# Altium PCB 避障车控制板.PcbDoc
Units mil, origin at the board's own origin, x right, y up, seen from the top; angles counter-clockwise.
Board outline 3937.01 x 3937.01 mil, 2 copper layers (Top Layer, Bottom Layer); 128 components, 92 nets, 445 pads, 218 vias.
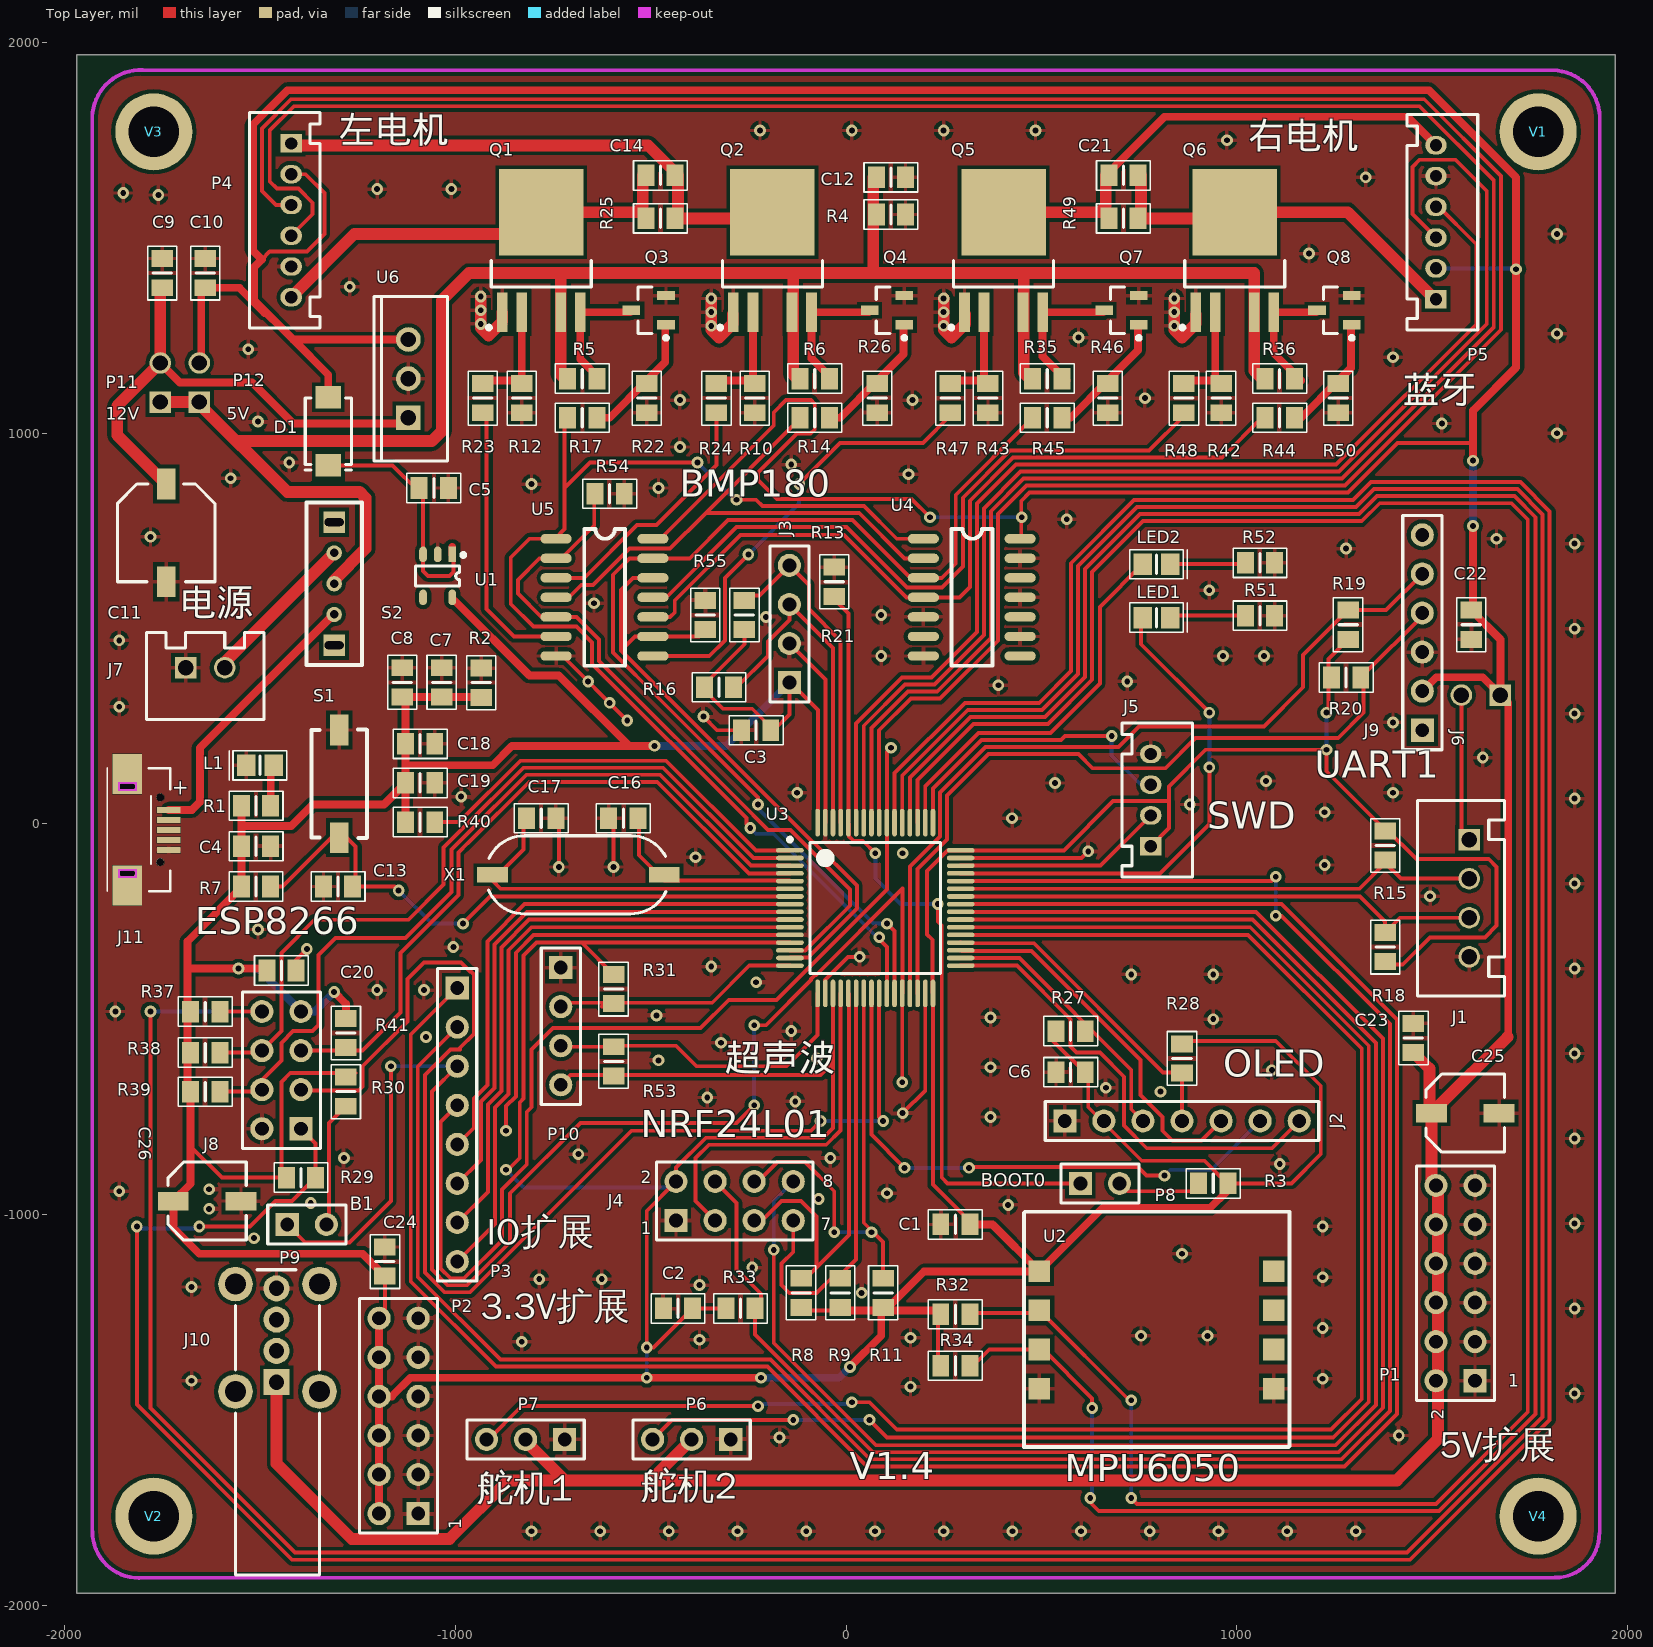
[diagram p0: Top Layer view]
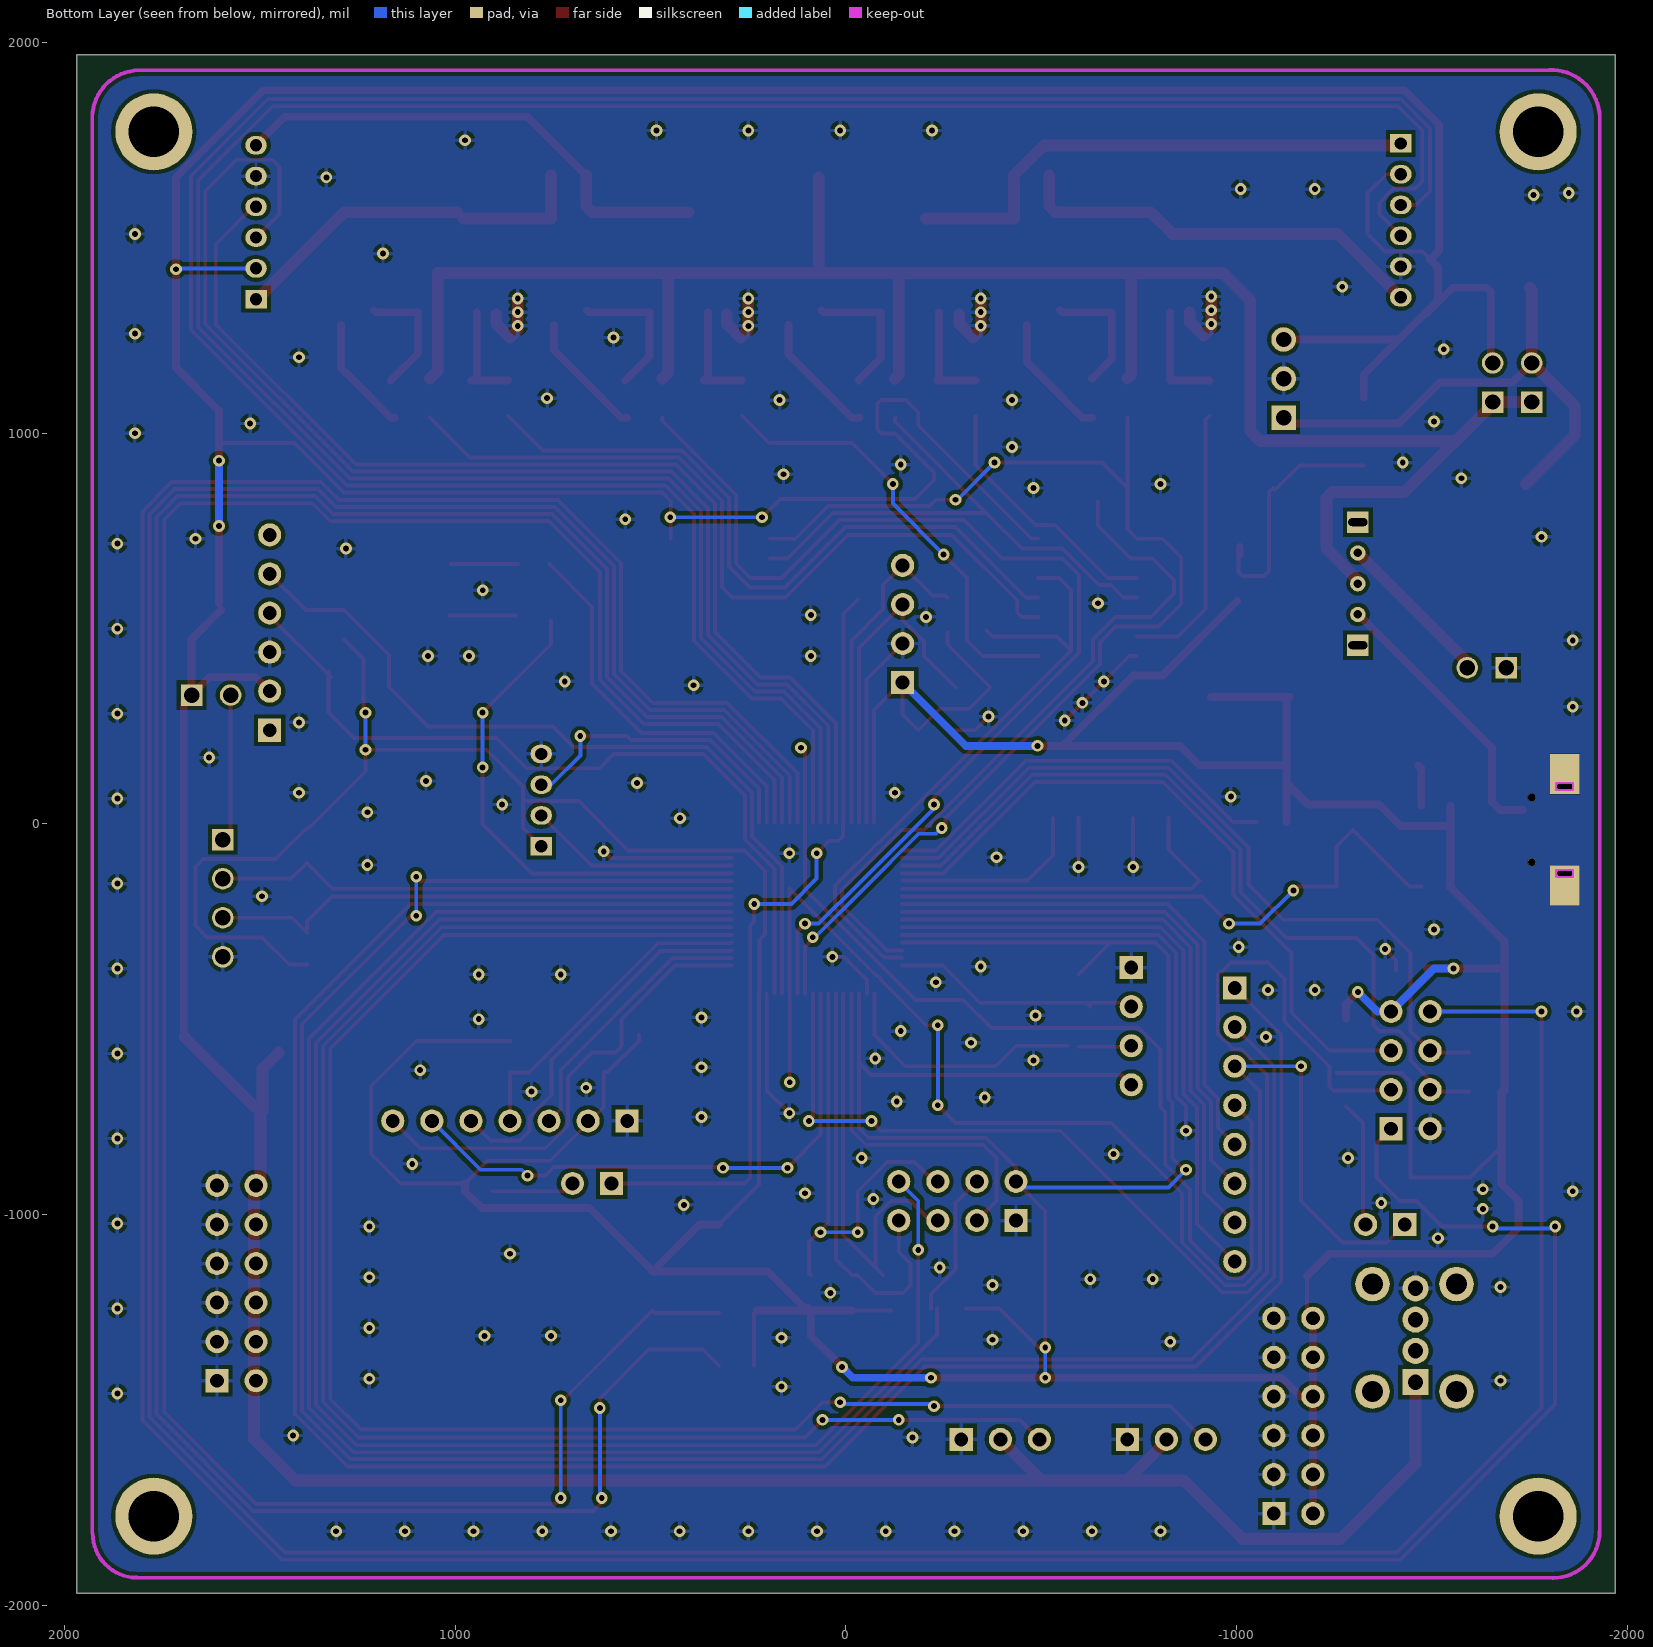
[diagram p1: Bottom Layer view, seen from below]

## Layer stack, top to bottom
Top Layer: signal copper 1.4
Dielectric: dielectric 12.6, FR-4, Dk 4.8
Bottom Layer: signal copper 1.4

## Board outline
-1968.5,-1968.5 1968.5,-1968.5 1968.5,1968.5 -1968.5,1968.5

## Design rules (kind name [scope] priority, off if disabled: settings)
Clearance J11 [InComponent('J11')] p1: gap=0.39
Clearance juli [InPolygon] p2: gap=10
Clearance mcu [InComponent('U3')] p3: gap=6
Clearance [All] p4: gap=8
ComponentClearance [All] p1: gap=2 collisioncheckmode=3 verticalgap=2 showdistances=FALSE
HoleSize [All] p1: absolutevalues=TRUE maxlimit=129.92 minlimit=1 maxpercent=80.000 minpercent=20.000
MinimumSolderMaskSliver MinimumSolderMaskSliver_3 [InComponent('J10')] p1: minsoldermaskwidth=1
MinimumSolderMaskSliver MinimumSolderMaskSliver_2 [InComponent('J11')] p2: minsoldermaskwidth=1
MinimumSolderMaskSliver MinimumSolderMaskSliver_1 [InComponent('U1')] p3: minsoldermaskwidth=5
MinimumSolderMaskSliver [All] p4: minsoldermaskwidth=10
PolygonConnect [All] p1: connectstyle=Relief reliefconductorwidth=10 reliefentries=4 polygonreliefangle="90 Angle"
RoutingVias [All] p1: holewidth=15 width=30 viastyle="Through Hole" minholewidth=5 minwidth=10 maxholewidth=40 maxwidth=50
SilkToSilkClearance [All] p1: silktosilkclearance=5
SilkscreenOverComponentPads [All] p1: minsilkscreentomaskgap=5
SolderMaskExpansion [All] p1: expansion=4
Width [All] p1: maxlimit=50 minlimit=10 preferedwidth=10
23 further rules are at their usual default settings.

## Components (designator, comment, footprint, x,y, rotation, side; value= is the part's Value field where it differs from the comment)
C1 "0.1uF" 0805_N_LY 280,-1025 r180 top
C2 "0.1uF" 0805_N_LY -430,-1240 r180 top
C3 "0.1uF" 0805_N_LY -230,240 r0 top
C4 "0.1uF" 0805_N_LY -1509.84,-56.67 r0 top
C5 "1uF" 0805_N_LY -1055,860 r180 top
C6 "0.1uF" 0805_N_LY 575,-635 r180 top
C7 "10uF" 0805_N_LY -1035,362.6 r90 top
C8 "0.1uF" 0805_N_LY -1135.77,362.6 r90 top
C9 "10uF" 0805_N_LY -1750,1410 r90 top
C10 "0.1uF" 0805_N_LY -1640,1410 r90 top
C11 "100uF" TC6.3*7.7 -1740,745 r270 top
C12 "1uF/50V" 0805_N_LY 115,1655 r0 top
C13 "0.1uF" 0805_N_LY -1300,-160 r180 top
C14 "N/A" 0805_N_LY -475,1660 r180 top
C16 "20pF" 0805_N_LY -570,15 r0 top
C17 "20pF" 0805_N_LY -780,15 r180 top
C18 "1uF" 0805_N_LY -1090,205 r180 top
C19 "0.1uF" 0805_N_LY -1090,105 r180 top
C20 "0.1uF" 0805_N_LY -1445,-375 r180 top
C21 "N/A" 0805_N_LY 710,1660 r180 top
C22 "0.1uF" 0805_N_LY 1600,510 r90 top
C23 "0.1uF" 0805_N_LY 1452.44,-547.6 r90 top
C24 "0.1uF" 0805_N_LY -1180,-1120 r90 top
C25 "10uF" TC5*5 1585,-740 r0 top
C26 "10uF" TC5*5 -1635,-965 r0 top
D1 "SS14" SMA -1325,1005 r270 top
J1 "XH2.54-4P" XH2.54-4P 1595,-90 r270 top
J2 "Header 7" HDR1X7 560,-760 r0 top
J3 "PH2.0-4P" HDR1X4 -145,361.87 r90 top
J4 "Header 4X2" HDR2X4 -435,-1015 r0 top
J5 "PH2.0-4P" PH2.0-4P 780,140 r90 top
J6 "XH2.54-2P" CAP2.54-2P 1625,330 r180 top
J7 "Header 2" XH2.54-2P -1640,400 r0 top
J8 "Header 4X2" HDR2X4 -1395,-780 r90 top
J9 "2.54" HDR1X6 1475,240 r90 top
J10 "USB-4" USB-C -1455,-1315 r270 top
J11 "micro USB" MICRO-USB -1820,-15 r270 top
L1 "LED" 0805_N_LED_LY -1500,150 r180 top
LED1 "LED-Y" 0805_N_LED_LY 794.57,528.33 r0 top
LED2 "LED-Y" 0805_N_LED_LY 794.57,665 r0 top
P1 "Header 6X2" HDR2X6 1610,-1425 r90 top
P2 "Header 6X2" HDR2X6 -1095,-1765 r90 top
P3 "extract" HDR1X8 -995,-420 r270 top
P4 "Header 6" PH2.0-6P -1420,1545 r270 top
P5 "Header 6" PH2.0-6P 1510,1540.26 r90 top
P6 "Header 3" HDR1X3 -295,-1575 r180 top
P7 "Header 3" HDR1X3 -720,-1575 r180 top
P8 "Header 2" HDR1X2 600,-920 r0 top
P9 "Header 2" HDR1X2 -1430,-1025 r0 top
P10 "Header 4" HDR1X4 -730,-367.53 r270 top
P11 "Header 2" CAP2.54-2P -1755,1130 r90 top
P12 "Header 2" CAP2.54-2P -1655,1130 r90 top
Q1 "TO-252-4" TO-252-4L -880,1310 r90 top
Q2 "TO-252-4" TO-252-4L -288.33,1310 r90 top
Q3 "SOT-23" SOT-23_N_LY -505,1315 r180 top
Q4 "SOT-23" SOT-23_N_LY 105,1315 r180 top
Q5 "TO-252-4" TO-252-4L 303.33,1310 r90 top
Q6 "TO-252-4" TO-252-4L 895,1310 r90 top
Q7 "SOT-23" SOT-23_N_LY 705,1315 r180 top
Q8 "SOT-23" SOT-23_N_LY 1250,1315 r180 top
R1 "1K" 0805_N_LY -1509.84,46.67 r180 top
R2 "1K" 0805_N_LY -933.66,361.67 r270 top
R3 "100K" 0805_N_LY 940,-920 r0 top
R4 "10K" 0805_N_LY 115,1560 r180 top
R5 "10K" 0805_N_LY -675,1140 r180 top
R6 "10K" 0805_N_LY -80,1140 r180 top
R7 "10K" 0805_N_LY -1510,-160 r0 top
R8 "10K" 0805_N_LY -115,-1200 r90 top
R9 "10K" 0805_N_LY -15,-1200 r90 top
R10 "10K" 0805_N_LY -233.33,1090 r270 top
R11 "10K" 0805_N_LY 95,-1200 r90 top
R12 "10K" 0805_N_LY -830,1090 r270 top
R13 "10K" 0805_N_LY -260,535 r270 top
R14 "1K" 0805_N_LY -80,1040 r0 top
R15 "10K" 0805_N_LY 1380,-315 r90 top
R16 "10K" 0805_N_LY -325,350 r180 top
R17 "1K" 0805_N_LY -675,1040 r180 top
R18 "10K" 0805_N_LY 1380,-55 r270 top
R19 "10K" 0805_N_LY 1285,510 r270 top
R20 "10K" 0805_N_LY 1280,375 r180 top
R21 "10K" 0805_N_LY -30,620 r90 top
R22 "10K" 0805_N_LY -510,1090 r90 top
R23 "10R" 0805_N_LY -930,1090 r270 top
R24 "10R" 0805_N_LY -331.67,1090 r270 top
R25 "N/A" 0805_N_LY -475,1550 r180 top
R26 "10K" 0805_N_LY 80,1090 r270 top
R27 "10K" 0805_N_LY 575,-530 r180 top
R28 "10K" 0805_N_LY 860,-600 r90 top
R29 "10K" 0805_N_LY -1395,-905 r0 top
R30 "100K" 0805_N_LY -1280,-685 r90 top
R31 "10K" 0805_N_LY -595,-422.53 r270 top
R32 "10K" 0805_N_LY 280,-1255 r180 top
R33 "10K" 0805_N_LY -270,-1240 r180 top
R34 "10K" 0805_N_LY 280,-1386.62 r180 top
R35 "10K" 0805_N_LY 515,1140 r180 top
R36 "10K" 0805_N_LY 1110,1140 r180 top
R37 "10K" 0805_N_LY -1640,-480 r180 top
R38 "10K" 0805_N_LY -1640,-585 r180 top
R39 "10K" 0805_N_LY -1640,-685 r180 top
R40 "0R" 0805_N_LY -1090,5 r0 top
R41 "10K" 0805_N_LY -1280,-535 r90 top
R42 "10K" 0805_N_LY 960,1090 r270 top
R43 "10K" 0805_N_LY 363.33,1090 r270 top
R44 "1K" 0805_N_LY 1110,1040 r0 top
R45 "1K" 0805_N_LY 515,1040 r180 top
R46 "10K" 0805_N_LY 670,1090 r90 top
R47 "10R" 0805_N_LY 266.67,1090 r270 top
R48 "10R" 0805_N_LY 865,1090 r270 top
R49 "N/A" 0805_N_LY 710,1550 r180 top
R50 "10K" 0805_N_LY 1260,1090 r270 top
R51 "10K" 0805_N_LY 1059.57,533.33 r0 top
R52 "10K" 0805_N_LY 1059.57,668.33 r0 top
R53 "10K" 0805_N_LY -595,-607.53 r90 top
R54 "10K" 0805_N_LY -605,845 r0 top
R55 "10K" 0805_N_LY -360,535 r90 top
S1 "SW-PB" SW-KEY -1368,-54.68 r90 top
S2 "SS12D07" SS-12D07 -1310,615 r270 top
U1 "XC6503D331" SOT23-5 -1045,635 r270 top
U2 "MPU6050S" MPU6050S 495,-1145 r0 top
U3 "STM32F103RCT6" LQFP64_N 75,-215 r0 top
U4 "74HCT14" SO-14 195,730 r0 top
U5 "74HCT08" SO-14 -745,730 r0 top
U6 "LM7805" TO-220 -1120,1140 r90 top
V1 "VIA" SH3.3#1 1785,1799.02 r0 top
V2 "VIA" SH3.3#2 3120,-715 r0 top
V3 "VIA" SH3.3#3 2290,-890 r0 top
V4 "VIA" SH3.3#4 2125,-1695 r0 top
X1 "8M" HC-49SMD -685,-130 r0 top

## Footprints (in the part's own frame and the unit in brackets; to place one, negate y for a bottom-side part, rotate by r counter-clockwise, add the part's x,y. Pads: shape width x height; smd on the part's side, far side on the other; paste and mask are expansions set on the pad)
0805_N_LED_LY [mm] "Chip R"
  rect 1.2x1.4 smd: 1(-0.9,0) 2(0.9,0)
  silkscreen extent -1.75,-0.95 2,0.95, body extent -1.07,-0.7 1.07,0.7, height 0.7
0805_N_LY [mm] "Chip R"
  rect 1.1x1.4 smd: 1(-0.95,0) 2(0.95,0)
  silkscreen extent -1.75,-0.95 1.75,0.95, body extent -1.07,-0.7 1.07,0.7, height 0.7
CAP2.54-2P [mm]
  rect 1.4x1.4 hole 1: 1(-1.27,0)
  round 1.4 hole 1: 2(1.27,0)
HC-49SMD [mm]
  rect 2x1 smd: 1(-5.588,0) 2(5.588,0)
  silkscreen extent -5.84,-2.54 5.7,2.54
HDR1X2 [mm]
  rect 1.5x1.5 hole 0.9: 1(0,0)
  round 1.5 hole 0.9: 2(2.54,0)
  silkscreen extent -1.27,-1.27 3.81,1.27
HDR1X3 [mm]
  rect 1.5x1.5 hole 0.9: 1(0,0)
  round 1.5 hole 0.9: 2(2.54,0) 3(5.08,0)
  silkscreen extent -1.27,-1.27 6.35,1.27
HDR1X4 [mm]
  rect 1.5x1.5 hole 0.9: 1(0,0)
  round 1.5 hole 0.9: 2(2.54,0) 3(5.08,0) 4(7.62,0)
  silkscreen extent -1.27,-1.27 8.89,1.27
HDR1X6 [mm]
  rect 1.5x1.5 hole 0.9: 1(0,0)
  round 1.5 hole 0.9: 2(2.54,0) 3(5.08,0) 4(7.62,0) 5(10.16,0) 6(12.7,0)
  silkscreen extent -1.27,-1.27 13.97,1.27
HDR1X7 [mm]
  rect 1.5x1.5 hole 0.9: 1(0,0)
  round 1.5 hole 0.9: 2(2.54,0) 3(5.08,0) 4(7.62,0) 5(10.16,0) 6(12.7,0) 7(15.24,0)
  silkscreen extent -1.27,-1.27 16.51,1.27
HDR1X8 [mm]
  rect 1.5x1.5 hole 0.9: 1(0,0)
  round 1.5 hole 0.9: 2(2.54,0) 3(5.08,0) 4(7.62,0) 5(10.16,0) 6(12.7,0) 7(15.24,0) 8(17.78,0)
  silkscreen extent -1.27,-1.27 19.05,1.27
HDR2X4 [mm]
  rect 1.5x1.5 hole 0.9: 1(0,0)
  round 1.5 hole 0.9: 2(0,2.54) 3(2.54,0) 4(2.54,2.54) 5(5.08,0) 6(5.08,2.54) 7(7.62,0) 8(7.62,2.54)
  silkscreen extent -1.27,-1.27 8.89,3.81
HDR2X6 [mm]
  rect 1.5x1.5 hole 0.9: 1(0,0)
  round 1.5 hole 0.9: 2(0,2.54) 3(2.54,0) 4(2.54,2.54) 5(5.08,0) 6(5.08,2.54) 7(7.62,0) 8(7.62,2.54) 9(10.16,0) 10(10.16,2.54) 11(12.7,0) 12(12.7,2.54)
  silkscreen extent -1.27,-1.27 13.97,3.81
LQFP64_N [mm]
  oval 1.8x0.3 smd: 1(-5.55,3.75) 2(-5.55,3.25) 3(-5.55,2.75) 4(-5.55,2.25) 5(-5.55,1.75) 6(-5.55,1.25) 7(-5.55,0.75) 8(-5.55,0.25) 9(-5.55,-0.25) 10(-5.55,-0.75) 11(-5.55,-1.25) 12(-5.55,-1.75) 13(-5.55,-2.25) 14(-5.55,-2.75) 15(-5.55,-3.25) 16(-5.55,-3.75) 33(5.55,-3.75) 34(5.55,-3.25) 35(5.55,-2.75) 36(5.55,-2.25) 37(5.55,-1.75) 38(5.55,-1.25) 39(5.55,-0.75) 40(5.55,-0.25) 41(5.55,0.25) 42(5.55,0.75) 43(5.55,1.25) 44(5.55,1.75) 45(5.55,2.25) 46(5.55,2.75) 47(5.55,3.25) 48(5.55,3.75)
  oval 0.3x1.8 smd: 17(-3.75,-5.55) 18(-3.25,-5.55) 19(-2.75,-5.55) 20(-2.25,-5.55) 21(-1.75,-5.55) 22(-1.25,-5.55) 23(-0.75,-5.55) 24(-0.25,-5.55) 25(0.25,-5.55) 26(0.75,-5.55) 27(1.25,-5.55) 28(1.75,-5.55) 29(2.25,-5.55) 30(2.75,-5.55) 31(3.25,-5.55) 32(3.75,-5.55) 49(3.75,5.55) 50(3.25,5.55) 51(2.75,5.55) 52(2.25,5.55) 53(1.75,5.55) 54(1.25,5.55) 55(0.75,5.55) 56(0.25,5.55) 57(-0.25,5.55) 58(-0.75,5.55) 59(-1.25,5.55) 60(-1.75,5.55) 61(-2.25,5.55) 62(-2.75,5.55) 63(-3.25,5.55) 64(-3.75,5.55)
  silkscreen extent -5.67,-4.25 4.25,4.57
MICRO-USB [mm]
  rect 0.4x1.55 smd: 1(-1.3,2.2) 2(-0.65,2.2) 3(0,2.2) 4(0.65,2.2) 5(1.3,2.2)
  rect 2.6x1.9 hole 0.4 slot 1 at 90 deg copper offset -0.8,0: 6(-2.825,-0.5)
  rect 2.6x1.9 hole 0.4 slot 1 at 90 deg copper offset 0.8,0: 6(2.825,-0.5)
  round 0.5 hole 0.5 unplated: ""(-2.1,1.65) ""(2.1,1.65)
  Keep-Out Layer lines w0.127: 3.054,-1.043 3.054,0.075 2.596,0.075 2.596,-1.043 3.054,-1.043 ; -2.596,-1.043 -2.596,0.075 -3.054,0.075 -3.054,-1.043 -2.596,-1.043
  silkscreen extent -4.05,-1.8 4,2.3
MPU6050S [mm]
  rect 1.4x1.4 smd: 1(0,0) 2(0,-2.54) 3(0,-5.08) 4(0,-7.62) 5(15.24,0) 6(15.24,-2.54) 7(15.24,-5.08) 8(15.24,-7.62)
  silkscreen extent -1,-11.43 16.25,3.88
PH2.0-4P [mm]
  rect 1.2x1.4 hole 0.8: 1(-5,0)
  oval 1.2x1.4 hole 0.8: 2(-3,0) 3(-1,0) 4(1,0)
  silkscreen extent -7.01,-2.72 3,1.88
PH2.0-6P [mm]
  rect 1.2x1.4 hole 0.8: 1(-5,0)
  oval 1.2x1.4 hole 0.8: 2(-3,0) 3(-1,0) 4(1,0) 5(3,0) 6(5,0)
  silkscreen extent -7.01,-2.72 7,1.88
SH3.3#1 [mm]
  round 5 hole 3.3: 1(-0.339,-0.695)
SH3.3#2 [mm]
  round 5 hole 3.3: 1(-124.248,-26.839)
SH3.3#3 [mm]
  round 5 hole 3.3: 1(-103.166,67.606)
SH3.3#4 [mm]
  round 5 hole 3.3: 1(-8.975,-1.947)
SMA [mm]
  rect 1.45x1.65 smd: 1(-2.21,0) 2(2.21,0)
  silkscreen extent -2.16,-1.5 2.51,1.5
SO-14 [mil]
  oval 80x24 smd: 1(2.95,0) 2(2.95,-50) 3(2.95,-100) 4(2.95,-150) 5(2.95,-200) 6(2.95,-250) 7(2.95,-300) 8(250.71,-300) 9(250.71,-250) 10(250.71,-200) 11(250.71,-150) 12(250.71,-100) 13(250.71,-50) 14(250.71,0)
  silkscreen extent 75,-325 180,25
SOT23-5 [mil] "SOT23, 5-Leads, Body 3.1x3."
  rect 40x20 smd: 1(-55,37.4)
  oval 40x20 smd: 2(-55,0) 3(-55,-37.4) 4(55,-37.4) 5(55,37.4)
  silkscreen extent -59,-57 26,70
SOT-23_N_LY [mm] "SOT23, 3-Leads, Body 2.9x1.3mm, Pitch"
  rect 1.15x0.6 smd: 1(-1.125,0.95) 2(-1.125,-0.95) 3(1.125,0)
  silkscreen extent -1.25,-1.5 0.7,1.92, body extent -0.7,-1.5 0.7,1.5, height 1.1
SS-12D07 [mm]
  round 1 hole 0.55: 1(-2,0) 2(0,0) 3(2,0)
  rect 1.4x1.4 hole 0.5 slot 1.25 at 90 deg: ""(-4,0) ""(4,0)
  silkscreen extent -5.28,-1.8 5.28,1.8
SW-KEY [mm]
  rect 2x1.2 smd: 1(0.5,-1.8) 2(7.5,-1.8)
  silkscreen extent 0.48,-3.6 7.52,0
TC5*5 [mm]
  rect 2x1.2 smd: 1(-2.2,0) 2(2.2,0)
  silkscreen extent -2.54,-2.54 2.54,2.54
TC6.3*7.7 [mm]
  rect 2x1.2 smd: 1(-3.175,0) 2(3.175,0)
  silkscreen extent -3.18,-3.18 3.18,3.18
TO-220 [mm]
  rect 1.6x1.6 hole 1: 1(-2.54,0)
  round 1.6 hole 1: 2(0,0) 3(2.54,0)
  silkscreen extent -5.35,-2.55 5.35,2.25
TO-252-4L [mm]
  rect 2.55x0.7 smd: 1(0,0) 2(0,-1.27) 3(0,-3.81) 4(0,-5.08)
  rect 5.6x5.5 smd: 5(6.5,-2.54)
  silkscreen extent -1.12,-5.79 3.35,0.98
USB-C [mm]
  round 2.25 hole 1.35: 0(-3.493,2.73) 0(-3.492,-2.731) 0(3.492,2.731) 0(3.493,-2.73)
  rect 1.7x1.7 hole 1: 1(2.883,-0.063)
  round 1.7 hole 1: 2(0.851,-0.063) 3(-1.181,-0.064) 4(-3.213,-0.064)
  silkscreen extent -4.43,-2.73 15.43,2.73
XH2.54-2P [mm]
  rect 1.4x1.4 hole 1: 1(-1.27,0)
  round 1.4 hole 1: 2(1.27,0)
  silkscreen extent -3.81,-3.35 3.81,2.29
XH2.54-4P [mm]
  rect 1.4x1.4 hole 1: 1(-1.27,0)
  round 1.4 hole 1: 2(1.27,0) 3(3.81,0) 4(6.35,0)
  silkscreen extent -3.81,-3.35 8.89,2.29

## Part data
C1 C2 C4 C5 C6 C7 C8 C9 C10 C12 C13 C14 C16 C17 C18 C19 C20 C21 C22: library part Cap, "Capacitor"
C11: library part Cap100uf
C25 C26: library part Cap10uf
J2 P6 P7 P10: "He"
J3: library part "Header 4", "He"
J4 J8: "Header, 4-Pin"
J5: library part "Header 4", "H"
J7 P4 P5: "H"
J9: library part "Header 6"
P1 P2: "Header, 6-Pin"
P3: library part "Header 8", "He"
Q3 Q4 Q7 Q8: library part NPN, "NPN Bipolar Transistor"
R1 R2 R4 R5 R6 R7 R10 R12 R14 R17 R21 R22 R23 R24 R25 R26 R35 R36 R40 R42 R43 R44 R45 R46 R47 R48 R49 R50: library part Res1, "Resistor"
U1: library part XC6503Dxxx

## Via types
v1: diameter 30, hole 15, Top Layer to Bottom Layer, tented both sides, 218 vias

## Nets (pads, with @x,y where several pads share a name; then routed paths per layer and width w, separated by ;. In a path a pad name is that pad's centre, name@x,y a point inside that pad or via, vN(x,y) a via of type N, cw(c..) or ccw(c..) an arc to the next point about the centre after c; other vN are vias at no path point)
BMP180_SCL: J3.3 R16.1 U3.62 | length 872.4
  Top Layer w10: R16.1@-280,350 -200,430 -200,467.01 -145,522.01 J3.3 -33.27,450.14 U3.62
BMP180_SDA: J3.4 R13.1 U3.61 | length 861.7
  Top Layer w10: R13.1@-260,580 -255,585 -221.87,585 J3.4 -95,611.87 -95,550 -13.58,468.58 U3.61
BOOT0: P8.1 R21.1 U3.60 | length 2042
  Top Layer w10: R21.1@-30,575 6.1,538.9 U3.60 7.79,1.82 7.79,-31.93 18.78,-42.93 42.93,-42.93 v1(75,-75) ; v1@230,-200 v1(235,-205) 235,-249.31 245,-259.31 245,-905 260,-920 P8.1@610,-920
  Bottom Layer w10: v1(75,-75) 75,-140 140,-205 v1(235,-205)
ESP_CH_PD: J8.3 U3.25 | length 3221.5
  Top Layer w10: J8.3 -1392.75,-682.25 -1247.06,-682.25 -1237.13,-672.32 -1237.13,-620.13 -1122,-505 -1122,-397 -1080,-355 -985,-355 -962.53,-377.47 -960.09,-377.47 -952.47,-385.09 -952.47,-537.62 -987.47,-572.62 -987.47,-577.47 -1012.62,-577.47 -1078,-642.86 -1078,-1148.05 -1027.53,-1198.53 -962.47,-1198.53 -548.95,-785 -90,-785 v1(-65,-760) ; U3.25 84.84,-749.84 88.61,-753.61 v1@88.61,-762.84
  Bottom Layer w10: v1(-65,-760) v1(95,-760)
ESP_GP0: J8.6 R38.1 U3.2 | length 2022
  Top Layer w10: R38.1@-1595,-585 -1500,-585 -1445,-530 -1445,-330 -1360,-245 -1120,-245 -1030,-155 -1030,-60 -983,-13 -982.54,-13 -825.54,144 -468.09,144 -237.04,-87.05 U3.2
ESP_GP2: J8.4 R39.1 U3.3 | length 2093.9
  Top Layer w10: R39.1@-1595,-685 -1500,-685 J8.4 -1495,-655 -1445,-605 -1445,-560 -1415,-530 -1365.46,-530 -1350,-514.54 -1350,-335 -1306.79,-291.79 -1127.25,-291.79 -1010,-174.54 -1010,-65.46 -975.54,-31 -975.09,-31 -818.09,126 -475.54,126 -242.81,-106.73 U3.3
ESP_GP16: J8.5 R41.1 U3.4 | length 1786.8
  Top Layer w10: J8.5 -1237.6,-580 -1140,-482.4 -1140,-330 -992,-182 -992,-72.91 -968.09,-49 -967.63,-49 -810.63,108 -483,108 -248.58,-126.42 U3.4
ESP_URXD: J8.8 R37.1 U3.53 | length 9829.9
  Top Layer w10: v1(-1780,-480) -1780,-1495.14 -1410.14,-1865 1435.91,-1865 1783,-1517.91 1783,792.46 1718.46,857 1351.09,857 1305.09,811 745.09,811 594,659.91 594,384 502,292 311.54,292 143.9,124.35 U3.53 ; R37.1 J8.8
  Bottom Layer w10: v1(-1780,-480) J8.8
ESP_UTXD: J8.1 R29.2 U3.54 | length 9664
  Top Layer w10: v1@-1815,-1035 -1815,-1485.6 -1417.6,-1883 1443.37,-1883 1801,-1525.37 1801,799.91 1725.91,875 1343.63,875 1297.63,829 737.63,829 576,667.37 576,391.46 494.54,310 304.09,310 124.21,130.12 U3.54 ; v1(-1655,-1030) -1525,-1030 -1460,-965 -1417.6,-965 R29.2 -1357.6,-817.4 J8.1
  Bottom Layer w10: v1@-1815,-1035 -1655,-1035 v1(-1655,-1030)
  other v1: -1815,-1030
EXTRACT1: P3.1 U3.41 | length 5824.3
  Top Layer w10: P3.1 -1114,-539 -1114,-1171 -896,-1389 -201,-1389 54,-1644 1276,-1644 1410,-1510 1410,-500 1115.16,-205.16 U3.41
EXTRACT2: P3.2 U3.44 | length 5721.8
  Top Layer w10: P3.2 -1096,-621 -1096,-1159 -884,-1371 -193.54,-1371 61.46,-1626 1268.54,-1626 1392,-1502.54 1392,-512 1115,-235 v1(1100,-235) ; U3.44 1088.9,-146.1 v1(1100,-135)
  Bottom Layer w10: v1(1100,-235) v1(1100,-135)
EXTRACT3: P3.3 P9.1 U3.28 | length 3722.8
  Top Layer w10: P9.1 -1384.06,-1070.94 -1270.94,-1070.94 -1165,-965 v1(-1165,-620) ; P3.3 -1060,-685 -1060,-1140.6 -1020.07,-1180.53 -969.93,-1180.53 -860,-1070.6 -860,-945 -680,-765 -280,-765 v1(-235,-720) ; v1(-235,-515) -205,-515 -89.54,-399.54 -89.54,-396.97 -79.64,-387.07 -77.07,-387.07 145,-165 U3.28@145,-432.4 ; v1(143.9,-661.1) U3.28
  Bottom Layer w10: v1(-1165,-620) P3.3 ; v1(-235,-720) v1(-235,-515)
EXTRACT4: P3.4 U3.55 | length 2608.6
  Top Layer w10: P3.4 -1037.53,-762.53 -1037.53,-1137.62 -1012.62,-1162.53 -977.38,-1162.53 -880.47,-1065.62 -880.47,-935.07 -817,-871.6 -817,-737 -805,-725 -805,-577.53 -749.94,-522.47 -372.47,-522.47 -300,-450 -177.43,-450 104.53,-168.04 U3.55 104.53,184.53 v1(115,195)
EXTRACT5: P3.5 U3.8 | length 1365.3
  Top Layer w10: P3.5 -952.47,-777.47 -952.47,-702.93 -918,-668.46 -918,-300.72 -822.44,-205.16 U3.8
EXTRACT6: P3.6 U3.9 | length 1442.2
  Top Layer w10: P3.6 -934.47,-859.47 -934.47,-710.38 -900,-675.91 -900,-308.18 -816.67,-224.84 U3.9
EXTRACT7: P3.7 U3.10 | length 1519.1
  Top Layer w10: P3.7 -916.47,-941.47 -916.47,-717.84 -882,-683.37 -882,-315.63 -810.89,-244.53 U3.10
EXTRACT8: P3.8 U3.11 | length 1596.1
  Top Layer w10: P3.8 -898.47,-1023.47 -898.47,-725.3 -864,-690.82 -864,-323.09 -805.12,-264.21 U3.11
GND: C1.2 C2.2 C3.1 C4.2 C5.1 C6.2 C7.2 C8.2 C9.2 C10.2 C11.2 C12.2 C13.2 C16.1 C17.1 C18.1 C19.1 C20.1 C22.1 C23.2 C24.2 C25.2 C26.2 J1.4 J2.1 J3.2 J4.1 J5.4 J7.1 J8.2 J9.3 J10.4 J11.5 L1.2 P1.1 P1.3 P1.5 P1.7 P1.9 P1.11 P2.1 P2.3 P2.5 P2.7 P2.9 P2.11 P4.5 P5.5 P6.1 P7.1 P10.1 Q1.1 Q2.1 Q3.2 Q4.2 Q5.1 Q6.1 Q7.2 Q8.2 R2.1 R4.1 R10.2 R12.2 R21.2 R22.1 R26.2 R42.2 R43.2 R46.1 R50.2 R51.2 R52.2 R54.2 R55.2 S1.2 U1.2 U2.4 U2.8 U3.12 U3.18 U3.31 U3.47 U3.63 U4.5 U4.7 U4.9 U4.11 U4.13 U5.7 U6.2 | length 3896.9
  Top Layer w10: C20.1 -1407.6,-347.6 v1(-1380,-320) ; v1(-870,-785) -870,-722.28 -845,-697.28 -845,-329.54 -799.35,-283.9 U3.12 ; U5.7 -725,430 v1(-560,265) ; v1(-735,-110) C17.1@-735,15 ; v1(-595,-110) C16.1@-595,15 ; v1(-365,275) -330,240 C3.1@-275,240 ; J3.2 -52.95,369.82 U3.63 ; U3.18@-54.05,-433.5 -54.05,-399.5 5.46,-340 v1(35,-340) ; v1(145,-740) 202.95,-682.05 U3.31 ; U3.47 602.95,-87.05 v1(620,-70)
  Top Layer w30: v1(-935,1350) -935,1270 -915,1250 -880,1285 Q1.1 ; v1(-345,1345) -345,1265 -325,1245 -290,1280 Q2.1@-290,1305 ; v1(250,1345) 250,1265 270,1245 305,1280 Q5.1@305,1305 ; v1(840,1345) 840,1265 860,1245 895,1280 Q6.1@895,1305
  other v1: -805,-1810 -629.17,-1810 -453.33,-1810 -277.5,-1810 -101.67,-1810 74.17,-1810 250,-1810 425.83,-1810 601.67,-1810 777.5,-1810 953.33,-1810 1129.17,-1810 1305,-1810 -170,-1570 1415,-1565 1865,-1457.5 165,-1440 -1675,-1425 1220,-1420 -830,-1325 -375,-1320 165,-1315 755,-1310 925,-1310 1220,-1290 1865,-1240 40,-1200 -1675,-1185 -375,-1180 -785,-1165 -625,-1165 1220,-1160 -240,-1135 860,-1100 -1515,-1060 1220,-1030 1865,-1022.5 -1630,-985 415,-975 -1370,-970 -70,-960 105,-945 -1860,-940 -1630,-935 1110,-870 -1285,-855 -40,-855 -685,-845 1865,-805 370,-750 -130,-710 -355,-700 805,-685 665,-675 1090,-630 370,-622.5 -480,-605 -75,-600 1865,-587.5 -320,-560 -1075,-545 -140,-530 940,-499.5 370,-495 -485,-490 -1870,-480 -1200,-425 -1080,-425 -230,-405 730,-385 940,-385 1865,-370 -345,-365 -1005,-315 -1505,-270 1495,-185 1865,-152.5 1225,-105 -385,-85 145,-75 425,15 1225,30 880,50 1865,65 -985,70 -125,80 1400,80 535,105 1075,110 1630,170 1400,260 1865,282.5 -1860,300 -605,310 390,355 -660,365 720,365 90,430 965,430 1070,430 -1860,470 1865,500 -205,530 90,535 -645,565 929.57,598.33 1280,705 1865,717.5 1665,730 -1780,735 565,780 -480,860 -805,870 -1575,885 160,895 -140,920 -1425,925 -425,965 1820,1000 1525,1025 -1505,1030 -425,1085 170,1085 765,1090 1400,1194.5 -1530,1215 595,1245 1820,1255 -345,1275 250,1275 840,1275 -935,1280 -345,1310 250,1310 840,1310 -935,1315 -1270,1375 1185,1460 1820,1510 -1760,1610 -1850,1615 -1200,1625 -1010,1625 1330,1655 975,1750 -220,1775 15,1775 250,1775 485,1775
HC-EN: J9.1
HC-RX: J9.5 R19.1 U3.29 | length 2060.4
  Top Layer w10: U3.29 163.58,-108.99 240.64,-31.93 240.64,80.64 357,197 697,197 750,250 1070,250 1170,350 1170,432.4 R19.1 1382.4,547.4 J9.5
HC-STATUS: J9.6
HC-TX: J9.4 R20.1 U3.30 | length 2057.3
  Top Layer w10: U3.30 183.27,-114.76 258.64,-39.39 258.64,73.18 364.46,179 595,179 631.25,142.75 817.75,142.75 895,220 1260,220 1325,285 R20.1@1325,382.6 ; R20.1 R20.1@1325,382.6 ; R20.1@1325,390 R20.1@1325,382.6 ; J9.4 1475,532.6 R20.1@1325,382.6
LED1: LED1.1 U3.45 | length 1281.6
  Top Layer w10: U3.45 804.04,-126.42 930,-0.46 v1(930,145) ; LED1.1@755,520 755,460 v1(930,285)
  Bottom Layer w10: v1(930,145) v1(930,285)
LED2: LED2.1 U3.50 | length 999.7
  Top Layer w10: U3.50 202.95,97.04 338.91,233 523,233 650,360 650,555.87 LED2.1
M1-A: C14.2 P4.6 Q1.5 R25.2 | length 1075
  Top Layer w30: P4.6 -1258.15,1510 -835.91,1510 Q1.5 -535.91,1565.91 -520,1581.81 C14.2@-520,1660
M1-B: C14.1 P4.1 Q2.5 R25.1 | length 1357.6
  Top Layer w30: P4.1@-1420,1736.85 -506.85,1736.85 -430,1660 -430,1550 Q2.5@-204.24,1550
M1-DIR: R17.2 U3.26 U4.1 U5.1 | length 3194.4
  Top Layer w10: U5.1@-745,730 -810,730 -858,682 -858,563 -800,505 -690,505 -650,465 -650,409.95 -255,14.95 -255,0 v1(-245,-10) ; U5.1@-743.52,731.48 -720,755 ; R17.2@-720,1040 -720,755 ; v1(-380,925) -655,925 -720,860 -720,755 ; v1(-280,830) -230,830 -214,814 46,814 130,730 U4.1@195,730 ; v1(85,-290) 80,-290 104.53,-314.53 U3.26
  Bottom Layer w10: v1(-380,925) -285,830 v1(-280,830) ; v1(-245,-10) -230,-25 -185.46,-25 -41.9,-168.56 -41.84,-168.56 80,-290.4 80,-290 v1(85,-290)
M1-DIR-N: R14.1 U4.2 U5.4 | length 1426.9
  Top Layer w10: U5.4@-745,580 -709.54,580 -677.54,612 -647.54,612 -554.54,705 -450,705 -365,790 ; R14.1@-125,1040 -125,1030 -365,790 ; U4.2@195,680 150,680 34,796 -359,796 -365,790
M1-ENC-A: P4.3 U3.56 | length 6368.9
  Top Layer w10: P4.3 -1459.37,1584.37 -1495,1620 -1495,1780 -1420,1855 1480,1855 1676,1659 1676,1265.09 1276.91,866 461.91,866 389,793.09 389,469 241,321 166,321 84.84,239.84 U3.56
M1-ENC-B: P4.4 U3.57 | length 6431.7
  Top Layer w10: P4.4 -1365,1560.63 -1365,1590 -1401.49,1626.49 -1456.49,1626.49 -1475,1645 -1475,1774.54 -1412.54,1837 1468,1837 1658,1647 1658,1272.54 1269.46,884 454.46,884 371,800.54 371,476.46 233.54,339 158.54,339 65.16,245.61 U3.57
M1-PWM-A: R23.2 U5.6 | length 703.1
  Top Layer w10: R23.2@-930,1045 -920,1035 -920,550 -850,480 U5.6@-745,480
M1-PWM-B: R24.2 U5.3 | length 659.4
  Top Layer w10: U5.3@-745,630 -670,630 -535,765 -485,765 -331.67,918.33 R24.2@-331.67,1045
M1_PWM: R54.1 U3.14 U5.2 U5.5 | length 1787.8
  Top Layer w10: R54.1@-644.37,825 -644.37,764.32 -728.69,680 U5.2 -785,680 -840,625 -840,590 -780,530 -689.54,530 -632,472.46 -632,417.4 -237,22.4 -237,22 -200,-15 -142.43,-15 10,-167.43 10,-209.28 -99.52,-318.8 -99.71,-318.8 -104.18,-323.27 U3.14
M2-A: C21.2 P5.6 Q5.5 R49.2 | length 1283.8
  Top Layer w20: C21.2@665,1660 815,1810 1437.11,1810 P5.6
  Top Layer w30: Q5.5 649.09,1565.91 665,1581.81 C21.2@665,1660
M2-B: C21.1 P5.1 Q6.5 R49.1 | length 940.3
  Top Layer w30: C21.1@755,1660 755,1550 Q6.5@979.09,1550 ; Q6.5 1284.09,1565.91 P5.1@1508.3,1341.7
M2-DIR: R45.2 U3.27 U4.3 U5.13 | length 2873.9
  Top Layer w10: v1(-225,50) -225,40 -225,67.57 -477.9,320.47 -596.06,438.63 -596.06,638.03 -554.09,680 -400,680 -302,778 17,778 165,630 245,630 281,666 281,842.37 470,1031.37 R45.2@470,1040 ; v1(105,-255) 124.21,-274.21 U3.27
  Bottom Layer w10: v1(-225,50) -225,40 -34.44,-150.56 -34.39,-150.56 70.05,-255 v1(105,-255)
M2-DIR-N: R44.1 U4.4 U5.10 | length 2046.8
  Top Layer w10: U5.10@-491.34,530 -450,530 -438.34,541.66 -438.34,571.66 -270,740 -5,740 155,580 290,580 317,607 317,827.46 427.54,938 963,938 R44.1@1065,1040
M2-ENC-A: P5.3 U3.58 | length 3234.9
  Top Layer w10: U3.58 45.47,251.38 151.09,357 226.09,357 353,483.91 353,808 447,902 1262,902 1640,1280 1640,1620 1560,1700 1468.02,1700 1450,1681.98 1450,1560.89 P5.3
M2-ENC-B: P5.4 U3.59 | length 2802.4
  Top Layer w10: U3.59 25.79,257.15 143.63,375 218.63,375 335,491.37 335,820 435,920 1254.54,920 1613,1278.46 1613,1483.91 P5.4@1513.64,1583.27
M2-PWM-A: R47.2 U5.8 | length 1143.7
  Top Layer w10: U5.8 -350,430 -310,470 -310,630 v1(-250,690) ; v1@-125,870 v1(-120,870) -15,975 196.67,975 R47.2@266.67,1045
  Bottom Layer w10: v1(-250,690) -120,820 v1(-120,870)
M2-PWM-B: R48.2 U5.11 | length 1780.7
  Top Layer w10: U5.11@-491.34,580 -460,580 -280,760 1.64,760 156.64,605 245.46,605 299,658.54 299,834.91 420.09,956 776,956 R48.2@865,1045
M2_PWM: R55.1 U3.15 U5.9 U5.12 | length 1626
  Top Layer w10: U5.12@-491.34,630 -545,630 -575.99,599.01 -575.99,444.01 ; R55.1@-360,495.63 -375.63,480 U5.9 -540,480 -575.99,444.01 ; U3.15 -141.82,-341.27 -96.72,-341.27 -92.26,-336.8 -92.06,-336.8 28,-216.74 28,-157.54 -82.54,-47 -84.97,-47 -472.52,340.54 -575.99,444.01
MPU6050_RX: R32.1 U2.2 U3.51 | length 6301.4
  Top Layer w10: U3.51 183.27,112.81 326.46,256 516.91,256 630,369.09 630,645 760,775 1320,775 1366,821 1703.54,821 1745,779.54 1745,-1505 1510,-1740 745,-1740 v1(730,-1725) ; R32.1@325,-1251.62 488.38,-1251.62 U2.2 730,-1480 v1(730,-1475)
  Bottom Layer w10: v1@730,-1720 v1(730,-1475)
MPU6050_TX: R34.1 U2.3 U3.52 | length 6386
  Top Layer w10: U3.52 163.58,118.58 319,274 509.46,274 612,376.54 612,652.46 752.54,793 1312.54,793 1358.54,839 1711,839 1765,785 1765,-1510.46 1517.46,-1758 647,-1758 625,-1736 v1(625,-1725) ; R34.1@325,-1386.62 366.62,-1345 U2.3 505,-1345 630,-1470 v1(630,-1495)
  Bottom Layer w10: v1@630,-1725 v1(630,-1495)
NetC5_2: C5.2 D1.2 U1.1 U1.3 | length 638.3
  Top Layer w10: D1.2 -1160.4,918 C5.2@-1097.4,855 ; C5.2 -1082.4,850 -1082.4,670 ; U1.3 -1082.4,647.4 -1070,635 -1015,635 -1005,645 U1.1@-1005,687.4
  Top Layer w20: U1.1 U1.1@-1007.6,708.78
NetC16_2: C16.2 U3.5 X1.2 | length 507.3
  Top Layer w10: C16.2@-530,15 -530,-80 -465,-145 U3.5@-144.61,-145
NetC17_2: C17.2 U3.6 X1.1 | length 963.2
  Top Layer w10: C17.2@-825,15 -825,-65 -905,-145 -884.21,-165.79 U3.6
NetJ1_1: J1.1 J6.2 | length 378.3
  Top Layer w10: J6.2 1575,-20 J1.1
NetJ7_2: J7.2 S2.1 | length 409.7
  Top Layer w15: J7.2 J7.2@-1590,413.74
  Top Layer w30: J7.2@-1590,413.74 S2.1
NetJ11_1: J11.1 S2.3 | length 711.4
  Top Layer w20: J11.1 -1673.82,36.18 -1653.79,56.21 -1653.79,194.3 -1311.83,536.26 S2.3
NetL1_1: L1.1 R1.1 | length 106.6
  Top Layer w20: R1.1 -1472.44,142.13 L1.1
NetLED1_2: LED1.2 R51.1 | length 170
  Top Layer w10: LED1.2@844.57,533.33 R51.1@1014.57,533.33
NetLED2_2: LED2.2 R52.1 | length 171.7
  Top Layer w10: LED2.2@839.57,665 R52.1@1011.23,665
NetP8_2: P8.2 R3.1 | length 212.9
  Top Layer w10: P8.2 720,-940 R3.1@904.57,-940
NetP9_2: P9.2 R30.1 | length 320.4
  Top Layer w10: P9.2@-1322.94,-1025 -1322.94,-765.35 R30.1
NetQ1_2: Q1.2 R12.1 R23.1 | length 275
  Top Layer w20: R23.1@-930,1135 -830,1135 Q1.2
NetQ1_4: Q1.4 Q3.3 R5.1 | length 325.5
  Top Layer w20: R5.1@-630,1140 -680,1190 Q1.4 -552.32,1310 Q3.3@-547.32,1315
NetQ2_2: Q2.2 R10.1 R24.1 | length 275.4
  Top Layer w20: R24.1@-331.67,1135 -233.33,1135 -238.33,1140 Q2.2
NetQ2_4: Q2.4 Q4.3 R6.1 | length 351.6
  Top Layer w20: R6.1@-31.67,1135 -88.33,1191.67 Q2.4 57.68,1310 Q4.3@62.68,1315
NetQ3_1: Q3.1 R17.1 R22.2 | length 321.6
  Top Layer w20: R17.1@-630,1040 -605,1040 -510,1135 -462.68,1182.32 Q3.1@-462.68,1277.6
NetQ4_1: Q4.1 R14.2 R26.1 | length 324.8
  Top Layer w20: R14.2@-35,1040 -15,1040 80,1135 147.32,1202.32 Q4.1@147.32,1277.6
NetQ5_2: Q5.2 R43.1 R47.1 | length 275.8
  Top Layer w20: R47.1@266.67,1135 363.33,1135 353.33,1145 Q5.2
NetQ5_4: Q5.4 Q7.3 R35.1 | length 362
  Top Layer w20: R35.1@565,1135 503.33,1196.67 Q5.4 657.68,1310 Q7.3@662.68,1315
NetQ6_2: Q6.2 R42.1 R48.1 | length 255
  Top Layer w20: R48.1@865,1135 R42.1@960,1135 ; 945,1150 Q6.2
NetQ6_4: Q6.4 Q8.3 R36.1 | length 318.7
  Top Layer w20: R36.1@1165,1135 1095,1205 Q6.4 1202.68,1310 Q8.3@1207.68,1315
NetQ7_1: Q7.1 R45.1 R46.2 | length 324
  Top Layer w20: R45.1@560,1040 575,1040 670,1135 747.32,1212.32 Q7.1@747.32,1277.6
NetQ8_1: Q8.1 R44.2 R50.1 | length 300.3
  Top Layer w20: R44.2@1155,1040 1165,1040 1260,1135 1292.32,1167.32 Q8.1@1292.32,1277.6
NetR40_2: R40.2 U3.1 | length 1068.8
  Top Layer w10: R40.2 -990,5 -833,162 -460.63,162 -230.78,-67.85 U3.1@-143.99,-67.85
NRF_CE: J4.3 U3.20 | length 929.8
  Top Layer w10: -385,-857.28 -385,-965 J4.3 ; -385,-855 -351,-821 -50.54,-821 -13.58,-784.04 U3.20
NRF_CSN: J4.4 R33.1 U3.40 | length 4378.6
  Top Layer w10: J4.4 -280,-970 -280,-1140 -217.6,-1202.4 R33.1@-217.6,-1240 ; R33.1 -232.6,-1306.49 68.91,-1608 1260.01,-1608 1374,-1494.01 1374,-549 1049.84,-224.84 U3.40
NRF_IRQ: J4.8 U3.39 | length 4246.1
  Top Layer w10: v1(-185,-1090) -185,-1328.63 76.37,-1590 1252.56,-1590 1356,-1486.56 1356,-560.09 1040.44,-244.53 U3.39
  Bottom Layer w10: v1(-185,-1090) -185,-965 J4.8
NRF_MISO: J4.7 R9.2 U3.22 | length 1092.9
  Top Layer w10: J4.7 -135,-1095 -165,-1125 -165,-1180.2 -145.2,-1200 -75,-1200 -30,-1155 -15,-1155 25.79,-1114.21 U3.22
NRF_MOSI: J4.6 R11.2 U3.23 | length 1200.9
  Top Layer w10: J4.6 -225,-915 -175,-865 -105,-865 -30,-940 v1(-30,-1045) ; U3.23 45.47,-1020.47 95,-1070 95,-1150 R11.2@90,-1155
  Bottom Layer w10: v1(-30,-1045) v1(65,-1045)
NRF_SCK: J4.5 R8.2 U3.21 | length 1092
  Top Layer w10: J4.5 -215,-1015 -165,-965 -115,-965 -75,-1005 -75,-1135 ; R8.2@-95,-1155 -75,-1135 ; U3.21 7.79,-435.19 7.79,-1052.21 -75,-1135
OLED_CS: J2.7 U3.33 | length 1203.5
  Top Layer w10: U3.33 437.83,-362.64 575,-499.8 575,-570 590,-585 650,-585 712,-647 712,-772.14 769.86,-830 1090,-830 J2.7
OLED_D0_SCK: J2.3 R27.1 U3.34 | length 698.2
  Top Layer w10: U3.34 443.6,-342.95 730,-629.35 730,-730 J2.3
OLED_D1_MOSI: J2.4 R28.1 U3.36 | length 819.2
  Top Layer w10: U3.36 295.19,-305.27 480.72,-305.27 811.45,-636 R28.1@860,-636 ; J2.4 R28.1@860,-645
OLED_DC: J2.6 U3.24 | length 1460
  Top Layer w10: U3.24 65.16,-795.16 v1(150,-880) ; v1(315,-880) 317.53,-877.47 746.96,-877.47 769.49,-900 v1(815,-900)
  Bottom Layer w10: v1(150,-880) v1(315,-880) ; v1(815,-900) 830,-885 935,-885 J2.6
OLED_RES: J2.5 U3.35 | length 962
  Top Layer w10: U3.35 295.19,-324.95 474.95,-324.95 754,-604 754,-693.86 810,-749.86 810,-785 835,-810 910,-810 J2.5
RST: C13.1 R7.2 S1.1 U3.7 | length 1577.2
  Top Layer w10: R7.2 -1441.83,-160 -1297.13,-15.31 -1255,-57.44 -1255,-160 -1155,-160 v1(-1145,-170) ; v1(-980,-255) -910.69,-185.69 -412.79,-185.69 -412.58,-185.47 U3.7
  Bottom Layer w10: v1(-1145,-170) -1060,-255 v1(-980,-255)
RUD1_PWM: P7.3 U3.37 | length 4386.6
  Top Layer w10: P7.3@-920,-1580 -830,-1490 v1(-225,-1490) ; v1(15,-1480) 60,-1480 130,-1550 1241.65,-1550 1320,-1471.65 1320,-575 1028.9,-283.9 U3.37
  Bottom Layer w10: v1(-225,-1490) -220,-1485 10,-1485 v1(15,-1480)
RUD2_PWM: P6.3 U3.38 | length 3991.7
  Top Layer w10: P6.3 -445,-1525 v1(-135,-1525) ; v1(60,-1525) 105,-1570 1247.1,-1570 1338,-1479.1 1338,-567.54 1034.67,-264.21 U3.38
  Bottom Layer w10: v1(-135,-1525) v1(60,-1525)
SWCLK: J5.3 U3.49 | length 790.7
  Top Layer w10: U3.49 222.64,91.27 346.37,215 550,215 560,225 v1(680,225) ; J5.3 J5.3@780,110
  Bottom Layer w10: v1(680,225) 680,175 754.37,100.63 J5.3
SWDIO: J5.2 U3.46 | length 539.8
  Top Layer w10: U3.46 651.38,-106.73 J5.2
UART1RX: J1.2 R18.2 U3.43 | length 1345.3
  Top Layer w10: U3.43 1314.21,-165.79 1380,-100 1420,-140 J1.2
UART1TX: J1.3 R15.2 U3.42 | length 1363.8
  Top Layer w10: U3.42 1315.47,-185.47 1380,-250 R15.2@1380,-270 ; R15.2 1417.6,-240 J1.3
ULT_RX: P10.2 R31.2 U3.16 | length 640.7
  Top Layer w10: P10.2 -719.87,-457.4 -342.4,-457.4 -247.64,-362.64 U3.16 ; -625,-467.53 R31.2@-617.4,-459.93
ULT_TX: P10.3 R53.2 U3.17 | length 792.2
  Top Layer w10: P10.3 -727.4,-570.13 -622.4,-570.13 R53.2 ; -567.4,-567.6 -435,-567.6 -382.6,-620 -152.64,-620 -72.64,-540 U3.17
VCC-3.3V: C1.1 C2.1 C3.2 C4.1 C6.1 C7.1 C8.1 C18.2 C19.2 C20.2 C24.1 C26.1 J2.2 J3.1 J4.2 J5.1 J8.7 P2.2 P2.4 P2.6 P2.8 P2.10 P2.12 P10.4 R1.2 R2.2 R3.2 R7.1 R8.1 R9.1 R11.1 R13.2 R15.1 R16.2 R18.1 R19.2 R20.2 R27.2 R28.2 R29.1 R30.2 R31.1 R32.2 R33.2 R34.2 R37.2 R38.2 R39.2 R40.1 R41.2 R53.1 U1.5 U2.1 U3.13 U3.19 U3.32 U3.48 U3.64 | length 19893.5
  Top Layer w10: -1677.4,-825 -1597.4,-905 -1445,-905 -1445,-660 -1422.47,-637.47 R30.2@-1255.13,-637.47 ; P2.12 -1180,-1250 C24.1 ; v1@-865,-885 -835,-855 -835,-712.73 -825,-702.73 -825,-337 -791.69,-303.69 -676.44,-303.69 ; P10.4 -704.87,-642.4 -65.67,-642.4 -33.27,-610 ; R31.1 -676.44,-303.69 ; -435,-881.82 J4.2 -510,-990 v1(-510,-1340) -492.6,-1340 C2.1 R33.2 ; -435,-879.54 -358.46,-803 -58,-803 -33.27,-778.27 -33.27,-610 ; R13.2@-260,490 -260,460 -370,350 -315,295 -240,295 -185,240 -145,280 J3.1 -142.27,361.87 -72,291.6 U3.64@-72,4.14 ; U3.13 -143.61,-303.69 -676.44,-303.69 ; R8.1@-115,-1245 R9.1@-15,-1245 ; U3.19 -33.27,-610 ; R11.1@95,-1235.43 R11.1@109.57,-1235.43 ; R32.2@228.38,-1245 235,-1251.62 R34.2@235,-1386.62 ; C1.1@325,-1025 222.64,-922.64 U3.32 220.95,-431.82 220.95,-296.35 207,-282.4 207,-120.12 259.75,-67.36 U3.48 557.64,-67.36 683.51,58.51 826.49,58.51 ; R27.2@530,-540 530,-555 610,-635 620,-635 620,-725.06 756.94,-862 917.43,-862 975.43,-920 1140,-920 1215,-845 1215,-670 1100,-555 R28.2@860,-555 ; J5.1 826.85,-10 826.85,58.87 826.49,58.51 ; v1(1230,285) 1235,290 R20.2@1235,375 ; R20.2@1235,380 1235,422.6 R19.2 ; R15.1@1380,-360 1425,-360 1495,-290 1635,-290 1665,-260 1665,-110 1645,-90 1460,-90 1380,-10 1375,-10 1230,135 v1(1230,190) 920,190 826.49,96.49 826.49,58.51
  Top Layer w15: C8.1 -1134.84,324.26 C8.1@-1127.4,324.26
  Top Layer w20: R39.2@-1685,-685 R37.2@-1685,-480 ; R39.2 -1677.4,-825 -1677.4,-920.79 C26.1 -1721.61,-1033.39 -1655,-1100 -1237.4,-1100 C24.1 ; R7.1 -1547.4,-5 ; R1.2 -1547.4,46.51 -1547.4,-5 ; R7.1@-1546.2,-161.2 -1685,-300 R37.2@-1685,-480 ; C20.2@-1487.4,-370 v1(-1555,-370) -1685,-370 R37.2@-1685,-480 ; v1(-1310,-430) -1280,-460 R41.2 ; P2.2 P2.4 P2.6 P2.8 ; P2.12 P2.10 P2.8 ; C8.1 C7.1 -934.59,325.2 R2.2 ; R40.1 C19.2 ; C8.1@-1127.4,324.26 C18.2 -1127.4,150 ; U1.5@-1001.3,571.3 -810,380 -735,380 -555,200 v1(-490,200) -855,200 -904.44,150.56 -1126.84,150.56 -1127.4,150 ; v1@-212.53,-1417.47 v1(-217.47,-1417.47) -1114.69,-1417.47 -1162.21,-1465 P2.8 ; R9.1@-15,-1245 R11.1@90,-1245 ; v1(10,-1390) 90,-1310 R11.1@90,-1245 ; R11.1@109.57,-1235.43 200,-1145 U2.1 ; R32.2@228.38,-1245 R11.1@90,-1245 ; C1.1@325,-1025 375,-1025 U2.1 ; R3.2@975.43,-920 975.43,-939.57 932.47,-982.53 657.47,-982.53 U2.1 ; -1547.4,-5 -1420,-5 -1365,50 -1182.4,50 C19.2 ; C19.2 -1127.4,150
  Bottom Layer w10: v1(-870,-885) -825,-930 -450,-930 J4.2 ; v1(-510,-1417.47) v1(-510,-1340) ; v1(1230,190) v1(1230,285)
  Bottom Layer w20: v1(-1555,-370) -1505,-370 J8.7 -1360,-480 v1(-1310,-430) ; v1(-490,200) -306.87,200 J3.1 ; v1(-217.47,-1417.47) -17.47,-1417.47 v1(10,-1390)
VCC-5V: C10.1 C22.2 C23.1 C25.1 D1.1 J6.1 J9.2 J10.1 P1.2 P1.4 P1.6 P1.8 P1.10 P1.12 P4.2 P5.2 P6.2 P7.2 P12.2 U4.14 U5.14 U6.3 | length 15720.6
  Top Layer w10: -1495,1445 -1475,1465 -1380,1465 -1335,1510 -1335,1615 -1383.11,1663.11 P4.2 ; U5.14@-491.34,730 -474.95,730 -185,1019.95 -185,1053.38 -153.38,1085 -90,1085 -80,1075 -80,1009.8 -90.36,999.44 -125.56,999.44 -225,900 -225,880.4 -176.6,832 168,832 v1(215,785) ; U4.14@448.66,730 448.66,827.29 469.37,848 1284.37,848 1411.37,975 1600,975
  Top Layer w20: P12.2@-1660,1180 -1650,1190 -1650,1362.6 C10.1 -1552.6,1372.6 -1488.23,1308.23 ; D1.1 -1325,1150 -1415,1240 ; U6.3 -1415,1240 ; J9.2 1510.56,375.56 1629.44,375.56 J6.1 ; C22.2 1675,472.4 J6.1 ; C22.2@1605,565 v1(1605,762.5) ; v1(1605,930) 1605,1058.33 1715,1168.33 v1(1715,1420) 1715,1655 1492,1878 -1429.53,1878 -1518,1789.53 -1518,1468 -1495,1445 -1515,1425 -1515,1340 -1415,1240 ; 1695,-545.39 1695,310 J6.1
  Top Layer w30: J10.1@-1457.5,-1438.5 -1457.5,-1637.5 -1265,-1830 -1015,-1830 -865,-1680 -720,-1680 ; P7.2 -820,-1580 -720,-1680 ; P6.2 -500,-1680 ; C23.1 1493.23,-625.79 1493.23,-734.84 C25.1 P1.12@1498.39,-925 ; P1.12@1515,-930 1515,-1575 1410,-1680 -500,-1680 ; C25.1@1515,-723.39 1693,-545.39 ; -720,-1680 -500,-1680
  Bottom Layer w10: v1(215,785) v1(450,785) ; P5.2 v1@1712.85,1422.15
  Bottom Layer w20: v1(1605,762.5) v1(1605,930)
VCC-12V: C9.1 C11.1 P11.2 U6.1 | length 1307.4
  Top Layer w20: P11.2 -1705,1130 -1520,1130 -1415,1025 -1135,1025 U6.1
  Top Layer w30: C9.1 -1755,1367.6 P11.2 -1865,1070 -1865,995 C11.1
VCC-IN: C12.1 P11.1 P12.1 Q1.3 Q2.3 Q5.3 Q6.3 R4.2 R5.2 R6.2 R35.2 R36.2 S2.2 | length 5208.8
  Top Layer w30: P11.1 -1660,1080 -1430,850 -1245,850 -1230,835 -1230,704.23 -1310,624.23 S2.2 ; -1560,980 -1060,980 -1035,1005 -1035,1340 -965,1410 -730,1410 ; R5.2@-720,1140 -730,1150 Q1.3 -730,1410 ; R6.2@-125,1140 -135,1150 -135,1410 ; C12.1@70,1655 70,1415 75,1410 ; R35.2@470,1140 455,1155 455,1410 ; R36.2@1065,1140 1045,1160 1045,1410 455,1410 ; -730,1410 -135,1410 ; -135,1410 75,1410 ; 75,1410 455,1410
pads on no net: J10.0 J10.2 J10.3 J11. J11.2 J11.3 J11.4 J11.6 S2. U1.4 U2.5 U2.6 U2.7 U4.6 U4.8 U4.10 U4.12 V1.1 V2.1 V3.1 V4.1

## Polygon pours and split planes (outlines as drawn)
GND on Bottom Layer "Top Layer-No Net" (solid, remove dead copper, pour order 8): -2155,2175 -2205,2125 -2205,-2340 2295,-2340 2395,-2240 2200,-2045 2200,2190
GND on Top Layer "Top Layer-No Net" (solid, remove dead copper, pour order 12): -2135,2150 -2130,2145 -2130,-2165 2135,-2165 2190,-2110 2140,-2060 2140,2135

## Keep-outs
Keep-Out Layer:
  lines w10: -1929.13,-1810.21 -1929.13,1820 ; -1929.13,1810 cw(c-1804.57,1805.43) -1800,1930 ; -1928.73,-1810.21 ccw(c-1810,-1810.98) -1810,-1929.72 ; -1810,-1929.13 1815,-1929.13 ; -1800,1929.13 1810,1929.13 cw(c1807.08,1807.08) 1929.13,1810 ; 1815,-1928.87 ccw(c1815,-1815.98) 1927.89,-1815.98 ; 1929.13,-1815.98 1929.13,1815

## Silkscreen, mask and mechanical layers (free items; w line width, h text height)
Top Overlay:
  text "左电机" at -1300,1720 h118.11
  text "右电机" at 1030,1705 h118.11
  text "蓝牙" at 1425,1055 h118.11
  text "12V" at -1895,1035 h31.5
  text "5V" at -1585,1035 h31.5
  text "BMP180" at -425,815 h118.11
  text "电源" at -1705,510 h118.11
  text "UART1" at 1200,95 h118.11
  text "SWD" at 925,-35 h118.11
  text "ESP8266" at -1665,-305 h118.11
  text "超声波" at -310,-655 h118.11
  text "OLED" at 965,-670 h118.11
  text "NRF24L01" at -525,-825 h118.11
  text "BOOT0" at 345,-940 h59.06
  text "B1" at -1270,-1000 h59.06
  text "IO扩展" at -920,-1100 h118.11
  text "3.3V扩展" at -935,-1290 h118.11
  text "5V扩展" at 1520,-1645 h118.11
  text "V1.4" at 10,-1700 h118.11
  text "MPU6050" at 560,-1705 h118.11
  text "舵机2" at -525,-1750 h118.11
  text "舵机1" at -945,-1755 h118.11
Drill Drawing:
  text ".LEGEND" at 207,-2467 h31.5
  text "100 * 100 mm" at -1076,-2495 h31.5
  text "Drill Drawing." at 212,-2597 h31.5

## Text inside footprints (layer, text, board x,y; h text height)
J4: Top Overlay "8" at -60,-930 h31.5; Top Overlay "7" at -65,-1040 h31.5; Top Overlay "1" at -525,-1050 h31.5; Top Overlay "2" at -525,-920 h31.5
J11: Top Overlay "+" at -1719.61,114.92 h39.37 r270
P1: Top Overlay "2" at 1530,-1525 h31.5 r90; Top Overlay "1" at 1695,-1440 h31.5
P2: Top Overlay "1" at -985,-1805 h31.5 r90